# Altium PCB PCB1.PcbDoc
Units mm, origin at the board's own origin, x right, y up, seen from the top; angles counter-clockwise.
Board outline 72.5 x 55 mm, 2 copper layers (Top Layer, Bottom Layer); 6 components, 67 nets, 108 pads, 0 vias.
Unrouted connection lines stored in the file: 38.
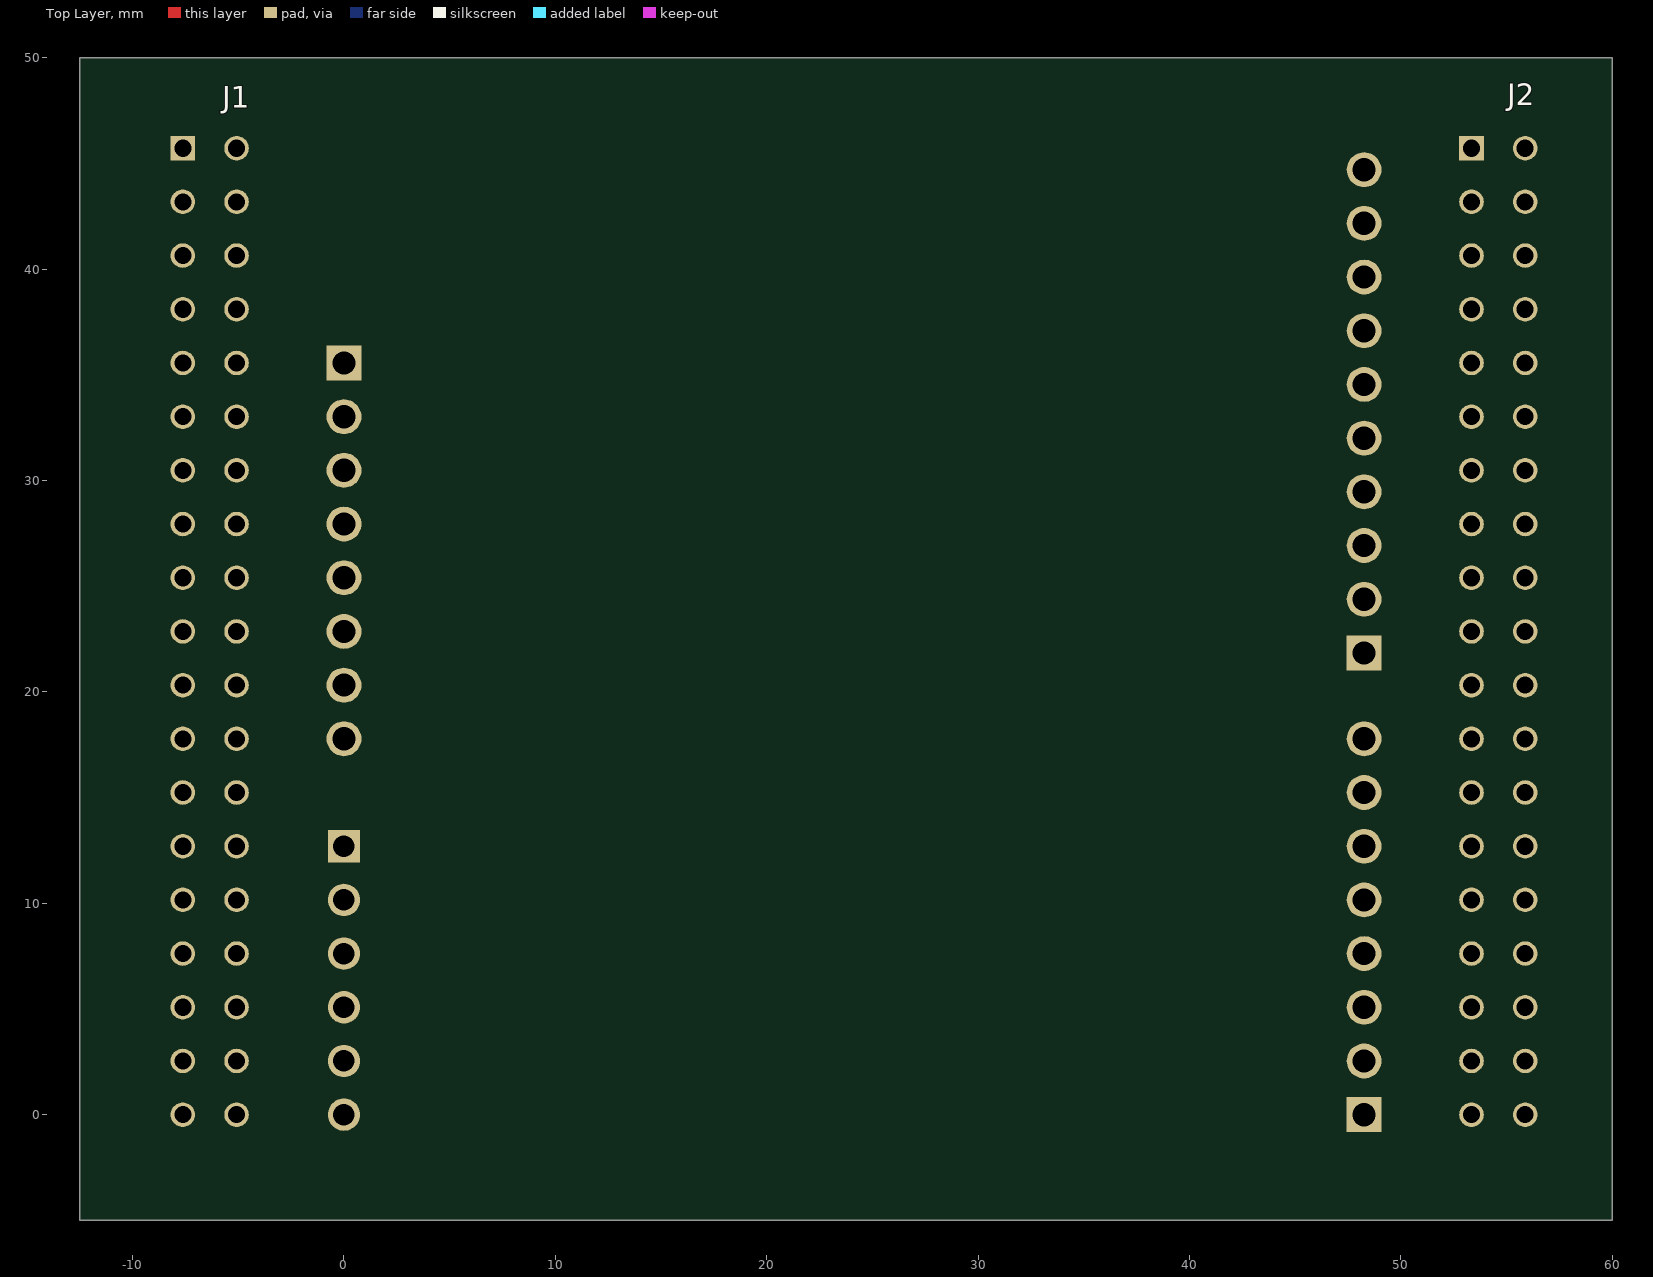
[diagram p0: Top Layer view]
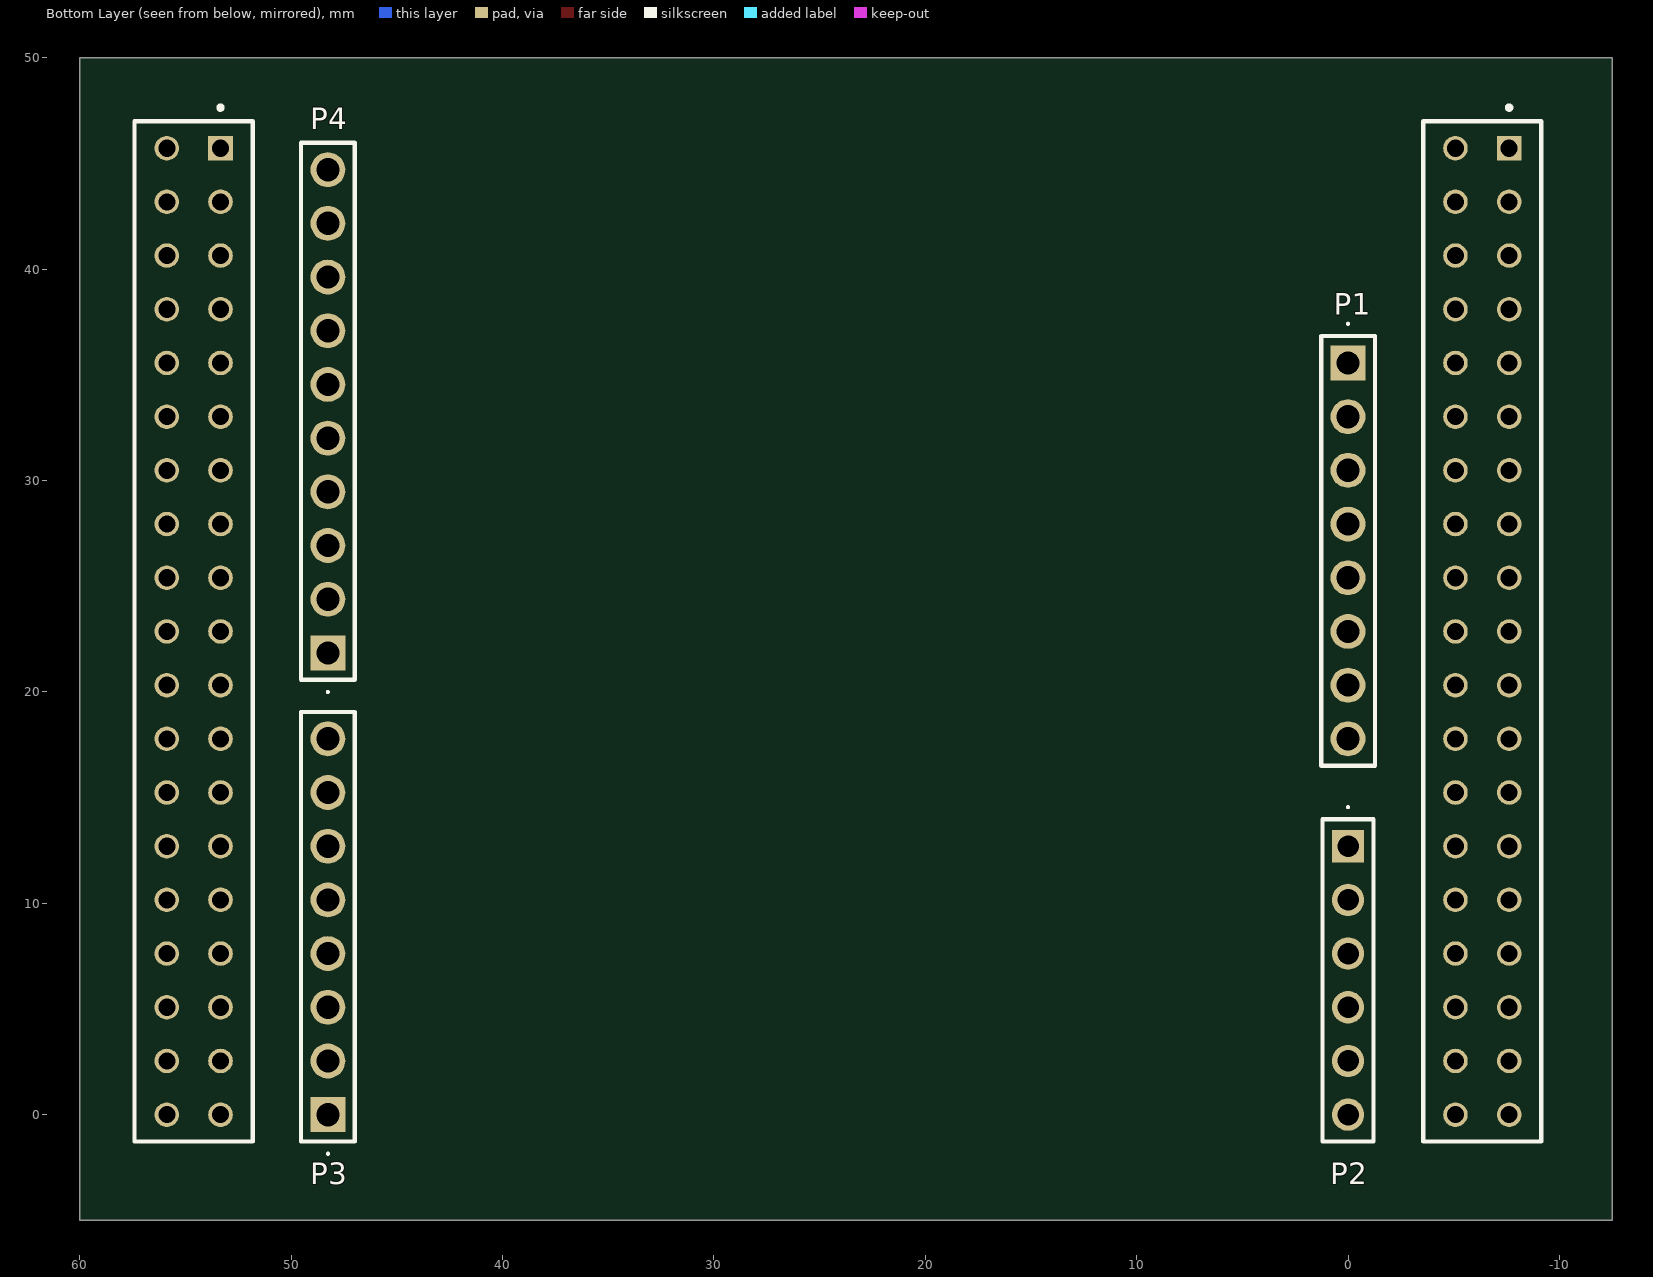
[diagram p1: Bottom Layer view, seen from below]

## Layer stack, top to bottom
Top Solder: solder mask 0.0102, Solder Resist, Dk 3.5
Top Layer: signal copper 0.0356
Dielectric 1: dielectric 0.32, FR-4, Dk 4.8
Bottom Layer: signal copper 0.0356
Bottom Solder: solder mask 0.0102, Solder Resist, Dk 3.5

## Board outline
-12.5,-5 -12.5,50 60,50 60,-5

## Design rules (kind name [scope] priority, off if disabled: settings)
BoardOutlineClearance [All] p1: gap=0.3 ignorepadtopadclearanceinfootprint=FALSE except(0: Arc-SplitContinuation Track-SplitContinuation SMDPad-SplitContinuation THPad-SplitContinuation Via-SplitContinuation Fill-SplitContinuation Poly-SplitContinuation Region-SplitContinuation Text-SplitContinuation)
Clearance [All] p1: gap=0.254 ignorepadtopadclearanceinfootprint=FALSE except(0: Arc-Hole Track-Hole SMDPad-Hole THPad-Hole Via-Hole Fill-Hole Poly-Hole Region-Hole Text-Hole; 0.127: Arc-Arc Arc-Track Arc-SMDPad Arc-Fill Arc-Poly Arc-Region Track-Track Track-SMDPad Track-Fill Track-Poly Track-Region SMDPad-SMDPad SMDPad-THPad SMDPad-Fill SMDPad-Poly SMDPad-Region Fill-Fill Fill-Poly Fill-Region Poly-Poly Poly-Region Region-Region; 0.33: Arc-THPad Track-THPad; 0.5: THPad-THPad)
ComponentClearance [All] p1 off: gap=0.254 collisioncheckmode=3 verticalgap=0.254 showdistances=FALSE
HoleSize [All] p1: absolutevalues=TRUE maxlimit=6.3 minlimit=0.3 maxpercent=80.000 minpercent=20.000
HoleToHoleClearance [All] p1: gap=0.5 allowstackedmicrovias=TRUE
MinimumAnnularRing [All] p1: minimumring=0.13
MinimumSolderMaskSliver [All] p1: minsoldermaskwidth=0.1
PlaneConnect [All] p1: planeconnectstyle=Direct reliefexpansion=0.508 reliefentries=4 reliefconductorwidth=0.254 reliefairgap=0.254
PolygonConnect PolygonConnect_Via [IsVia] p1: connectstyle=Direct reliefconductorwidth=0.254 reliefentries=4 polygonreliefangle="90 Angle" airgapwidth=0.254
PolygonConnect [All] p2: connectstyle=Relief reliefconductorwidth=0.254 reliefentries=4 polygonreliefangle="90 Angle" airgapwidth=0.254
RoutingVias [All] p1: holewidth=0.35 width=0.65 viastyle="Through Hole" minholewidth=0.3 minwidth=0.6 maxholewidth=6.3 maxwidth=7
SilkToSilkClearance [All] p1: silktosilkclearance=0
SilkToSolderMaskClearance [IsPad] p1: minsilkscreentomaskgap=0.15 clearancetoexposedcopper=TRUE
SolderMaskExpansion [All] p1: expansion=0.102 istentingtop=FALSE
Width [All] p1: maxlimit=10 minlimit=0.127 preferedwidth=0.254
23 further rules are at their usual default settings.

## Components (designator, comment, footprint, x,y, rotation, side; value= is the part's Value field where it differs from the comment)
J1 "CES-119-02-T-D" SAMTEC_CES-119-02-T-D -7.62,45.72 r270 top
J2 "CES-119-02-T-D" SAMTEC_CES-119-02-T-D 53.34,45.72 r270 top
P1 "61300811121" HDRV8W64P0X254_1X8_2032X254X854P 0,35.56 r270 bottom
P2 "10129378-906001BLF" 10129378906001BLF 0,12.7 r270 bottom
P3 "61300811121" HDRV8W64P0X254_1X8_2032X254X854P 48.26,0 r90 bottom
P4 "TSW-110-07-G-S" HDRV10W64P0X254_1X10_2540X254X838P 48.26,21.844 r90 bottom

## Footprints (in the part's own frame and the unit in brackets; to place one, negate y for a bottom-side part, rotate by r counter-clockwise, add the part's x,y. Pads: shape width x height; smd on the part's side, far side on the other; paste and mask are expansions set on the pad)
10129378906001BLF [mm]
  rect 1.53x1.53 hole 1.02: 1(0,0)
  round 1.53 hole 1.02: 2(2.54,0) 3(5.08,0) 4(7.62,0) 5(10.16,0) 6(12.7,0)
  silkscreen extent -1.9,-1.2 13.97,1.2, body extent -1.27,-1.2 13.97,1.2, height 8.41
HDRV8W64P0X254_1X8_2032X254X854P [mm]
  rect 1.65x1.65 hole 1.1: 1(0,0)
  round 1.65 hole 1.1: 2(2.54,0) 3(5.08,0) 4(7.62,0) 5(10.16,0) 6(12.7,0) 7(15.24,0) 8(17.78,0)
  silkscreen extent -1.9,-1.27 19.05,1.27, body extent -1.27,-1.27 19.05,1.27, height 8.54
HDRV10W64P0X254_1X10_2540X254X838P [mm]
  rect 1.65x1.65 hole 1.1: 1(0,0)
  round 1.65 hole 1.1: 2(2.54,0) 3(5.08,0) 4(7.62,0) 5(10.16,0) 6(12.7,0) 7(15.24,0) 8(17.78,0) 9(20.32,0) 10(22.86,0)
  silkscreen extent -1.9,-1.27 24.13,1.27, body extent -1.27,-1.27 24.13,1.27, height 8.38
SAMTEC_CES-119-02-T-D [mm]
  rect 1.16x1.16 hole 0.81: 1(0,0)
  round 1.16 hole 0.81: 2(0,2.54) 3(2.54,0) 4(2.54,2.54) 5(5.08,0) 6(5.08,2.54) 7(7.62,0) 8(7.62,2.54) 9(10.16,0) 10(10.16,2.54) 11(12.7,0) 12(12.7,2.54) 13(15.24,0) 14(15.24,2.54) 15(17.78,0) 16(17.78,2.54) 17(20.32,0) 18(20.32,2.54) 19(22.86,0) 20(22.86,2.54) 21(25.4,0) 22(25.4,2.54) 23(27.94,0) 24(27.94,2.54) 25(30.48,0) 26(30.48,2.54) 27(33.02,0) 28(33.02,2.54) 29(35.56,0) 30(35.56,2.54) 31(38.1,0) 32(38.1,2.54) 33(40.64,0) 34(40.64,2.54) 35(43.18,0) 36(43.18,2.54) 37(45.72,0) 38(45.72,2.54)
  body extent -1.27,-1.52 46.99,4.06, height 5.26

## Part data
J1 J2: "Headers & Wire Housings .100\" Closed Entry Low Profile Socket Strip, 2x19"
P1 P3: "Headers & Wire Housings WR-PHD 2.54mm Hdr 8P Single Str Gold", Manufacturer_Name="Wurth Elektronik", Mouser Part Number=710-61300811121, Datasheet Link=http://katalog.we-online.de/em/datasheet/6130xx11121.pdf, Height=8.54mm, Manufacturer_Part_Number=61300811121, Mouser Price/Stock=https://www.mouser.co.uk/ProductDetail/Wurth-Elektronik/61300811121?qs=PhR8RmCirEZRdx%252BVlEmRRA%3D%3D
P2: "Headers & Wire Housings ECONOSTIK HEADER SR VT TH 1X6", Manufacturer_Name="Amphenol Communications Solutions", Datasheet Link=https://cdn.amphenol-cs.com/media/wysiwyg/files/documentation/datasheet/boardwiretoboard/bwb_econostik_254headers.pdf, Height=8.58mm, Manufacturer_Part_Number=10129378-906001BLF
P4: "Headers & Wire Housings Classic PCB Header Strips, 0.100\" pitch", Manufacturer_Name=SAMTEC, Mouser Part Number=200-TSW11007GS, Arrow Part Number=TSW-110-07-G-S, Arrow Price/Stock=https://www.arrow.com/en/products/tsw-110-07-g-s/samtec?region=nac, Datasheet Link=https://suddendocs.samtec.com/catalog_english/tsw_th.pdf, Height=8.38mm, Manufacturer_Part_Number=TSW-110-07-G-S, Mouser Price/Stock=https://www.mouser.co.uk/ProductDetail/Samtec/TSW-110-07-G-S?qs=FESYatJ8odKyHT0KAD0CRw%3D%3D

## Nets (pads, with @x,y where several pads share a name; then routed paths per layer and width w, separated by ;. In a path a pad name is that pad's centre, name@x,y a point inside that pad or via, vN(x,y) a via of type N, cw(c..) or ccw(c..) an arc to the next point about the centre after c; other vN are vias at no path point)
+3V3: J1.12 J1.16 P1.2 P1.4
+5V: J1.18 P1.5
AVDD: J2.7 P4.8
BOOT0: J1.7
E5V: J1.6
GND: J1.8 J1.19 J1.20 J1.22 J2.9 J2.20 J2.32 P1.6 P1.7 P4.7
NRST: J1.14 P1.3
PA0: J1.28 P2.1
PA1: J1.30 P2.2
PA2: J2.35 P3.2
PA3: J2.37 P3.1
PA4: J1.32 P2.3
PA5: J2.11 P4.6
PA6: J2.13 P4.5
PA7: J2.15 P4.4
PA8: J2.23 P3.8
PA9: J2.21 P4.1
PA10: J2.33 P3.3
PA11: J2.14
PA12: J2.12
PA13: J1.13
PA14: J1.15
PA15: J1.17
PB0: J1.34 P2.4
PB1: J2.24
PB2: J2.22
PB3: J2.31 P3.4
PB4: J2.27 P3.6
PB5: J2.29 P3.5
PB6: J2.17 P4.3
PB7: J1.21
PB8: J2.3 P4.10
PB9: J2.5 P4.9
PB10: J2.25 P3.7
PB11: J2.18
PB12: J2.16
PB13: J2.30
PB14: J2.28
PB15: J2.26
PC0: J1.38 P2.6
PC1: J1.36 P2.5
PC2: J1.35
PC3: J1.37
PC4: J2.34
PC5: J2.6
PC6: J2.4
PC7: J2.19 P4.2
PC8: J2.2
PC9: J2.1
PC10: J1.1
PC11: J1.2
PC12: J1.3
PC13: J1.23
PC14: J1.25
PC15: J1.27
PD2: J1.4
PD8: J2.10
PF4: J2.38
PF5: J2.36
PF6: J1.9
PF7: J1.11
PH0: J1.29
PH1: J1.31
U5V: J2.8
VBAT: J1.33
VDD: J1.5
VIN: J1.24 P1.8
pads on no net: J1.10 J1.26 P1.1

## Silkscreen, mask and mechanical layers (free items; w line width, h text height)
Mechanical 1:
  the board outline again, w0.254